# EAGLE board M_3x4._v5 (EAGLE 9.6.2)
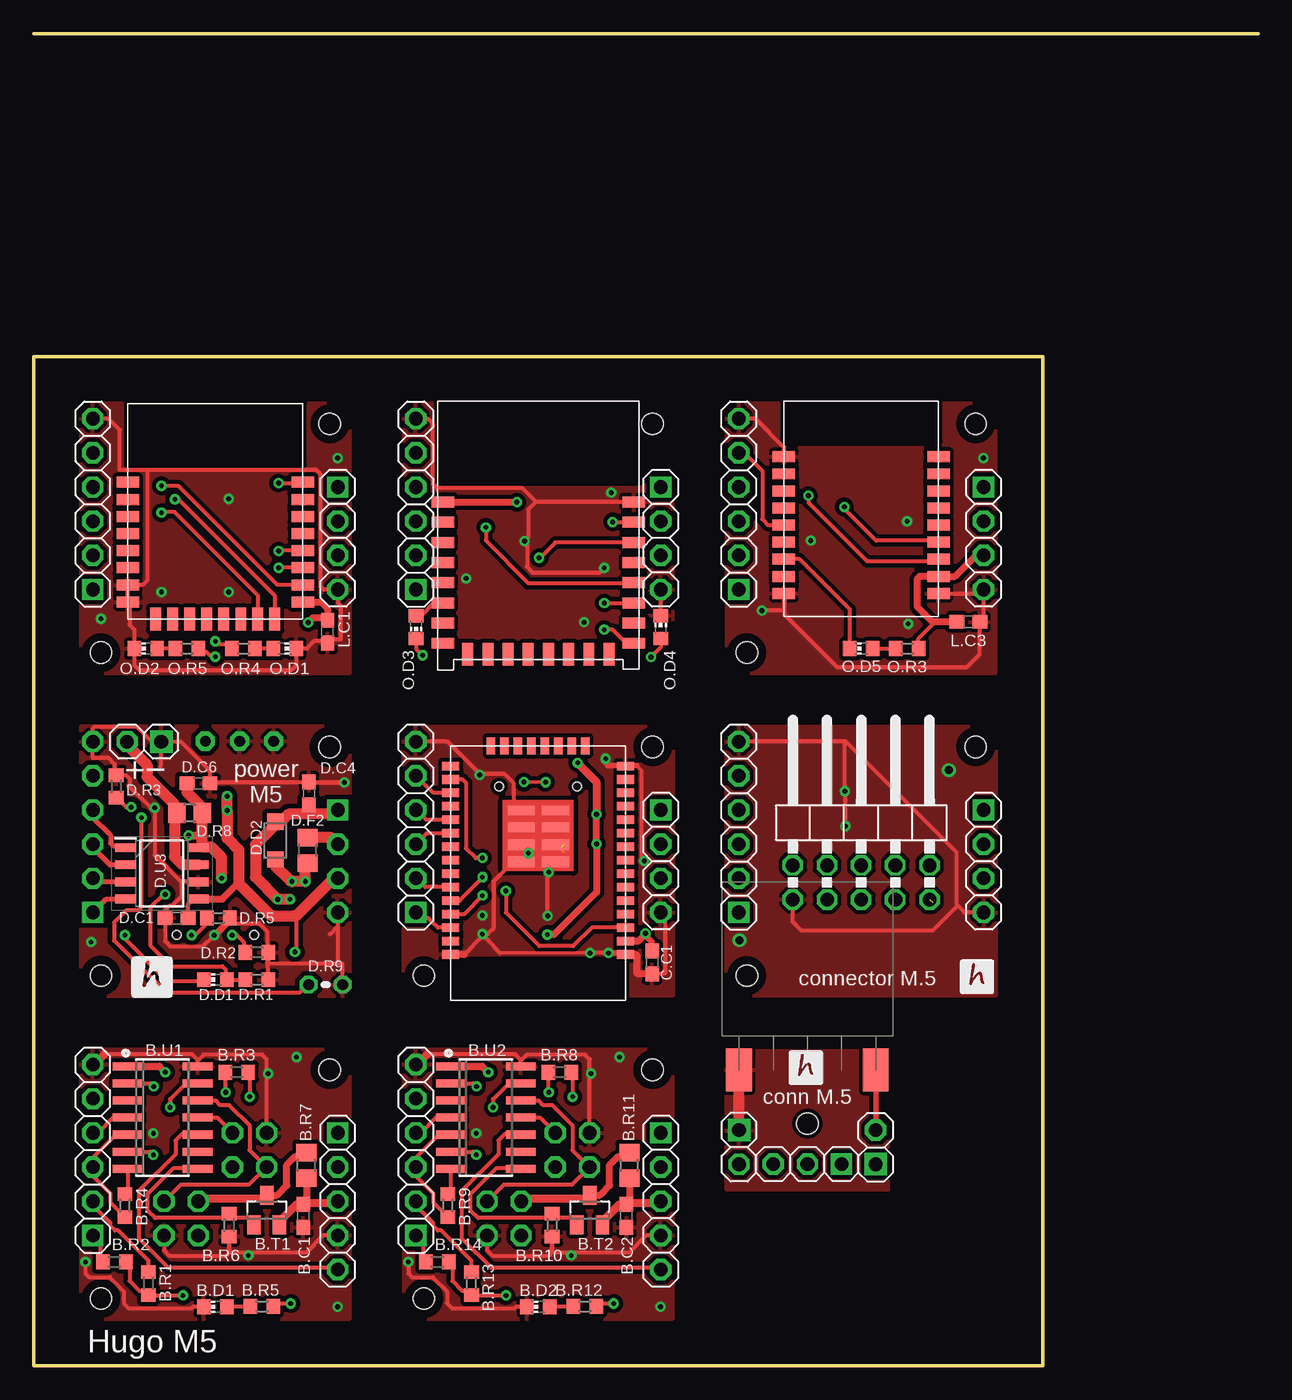
[diagram p0: board, top side]
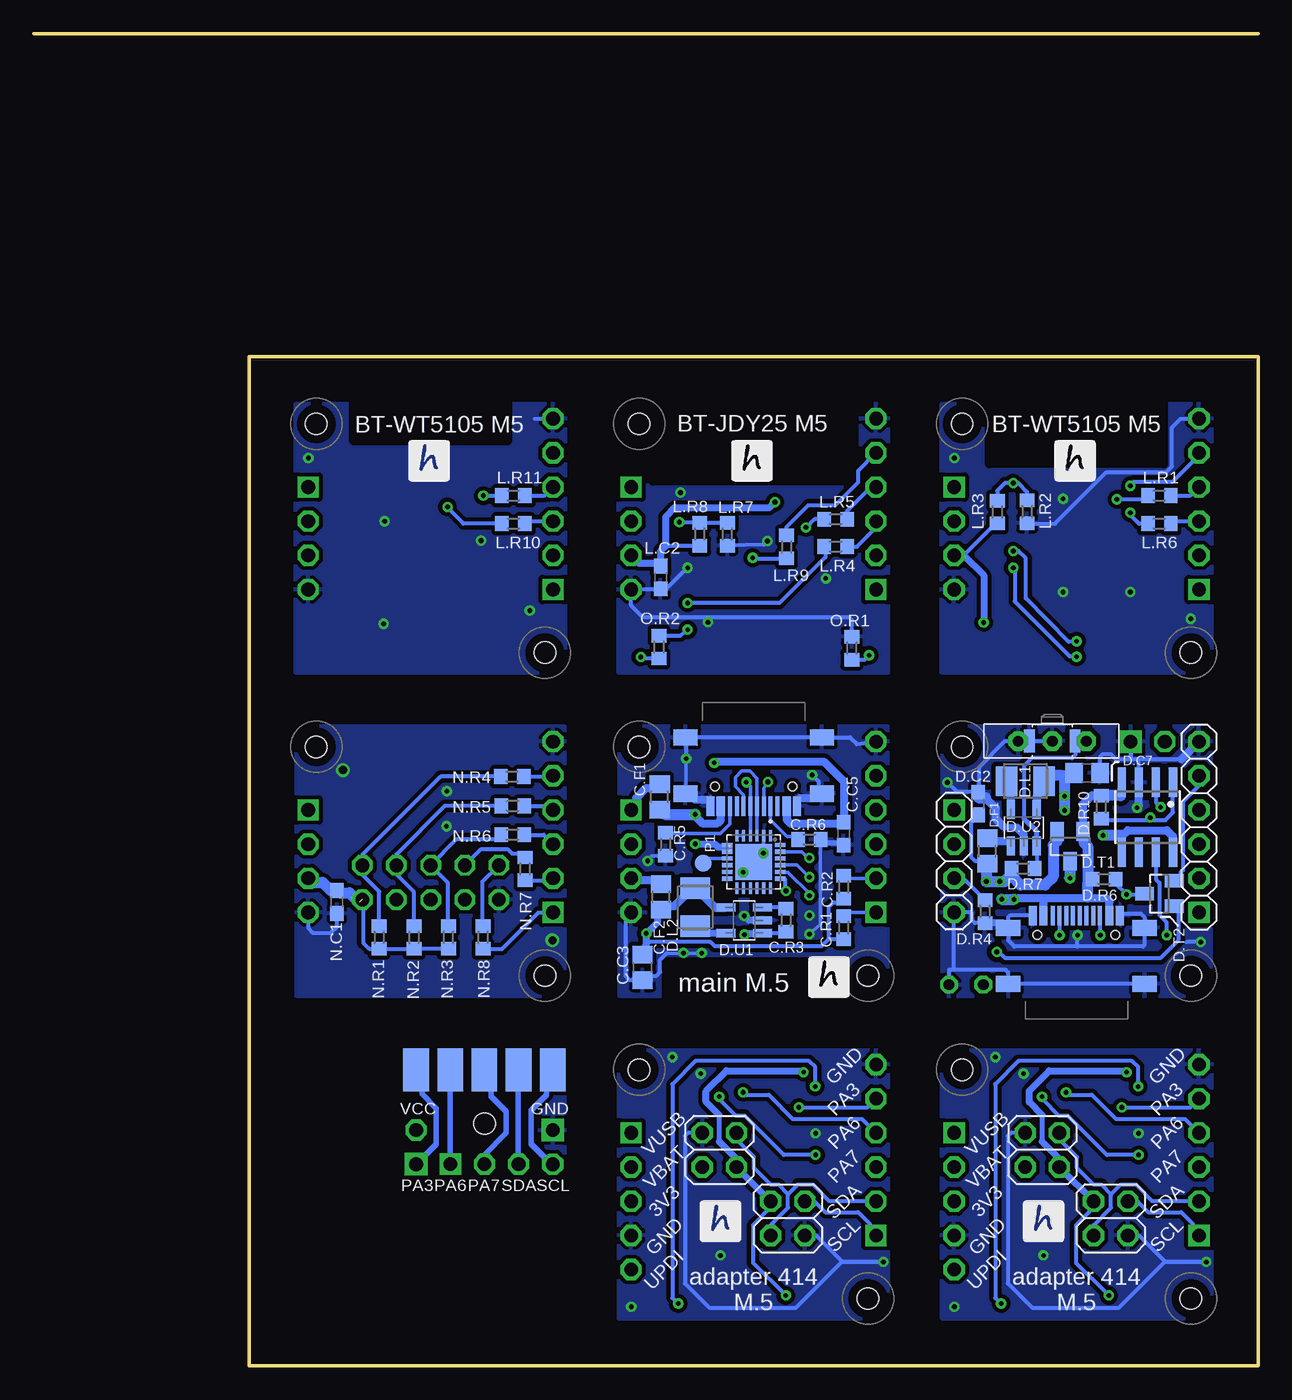
[diagram p1: board, bottom side, seen from below]

Size 91 x 99 mm. Coordinates in mm from the lower left corner, seen from the top.
Outline: 91,99 0,99
Outline: 0,0 75,0 75,75 0,75 0,0
Copper layers (1*16): Top 0.035mm / dielectric 1.5mm / Bottom 0.035mm
Design rules "default *": minimum track width 10mil, minimum drill 0.35mm, track to track 6mil, track to pad 6mil, pad to pad 6mil, via to via 6mil, smd to smd 6mil, copper to edge 0mil, drill to drill 15mil, minimum pad ring 10mil, minimum via ring 8mil, stop-mask expansion 4mil, vias tented up to drill 0mil, thermal gap 10mil
Holes 1.6 mm at 70,46 53,29 5,29 22,46 29,29 46,46 5,53 22,70 46,70 53,53 70,70 57.5,18 5,5 22,22 29,5 46,22
tRestrict: area 69,45 to 71,47; area 52,28 to 54,30; area 21,45 to 23,47; area 4,28 to 6,30; area 45,45 to 47,47; area 28,28 to 30,30; area 21,69 to 23,71; area 4,52 to 6,54; area 45,69 to 47,71; area 69,69 to 71,71; area 52,52 to 54,54; area 21,21 to 23,23; 3 more areas
bRestrict: area 52,28 to 54,30; area 69,45 to 71,47; area 4,28 to 6,30; area 21,45 to 23,47; area 28,28 to 30,30; area 45,45 to 47,47; area 4,52 to 6,54; area 21,69 to 23,71; area 45,69 to 47,71; area 52,52 to 54,54; area 69,69 to 71,71; area 21,21 to 23,23; 3 more areas

## Footprints (pad centres in the part's own frame; a part is rotated, then mirrored left to right if it is on the bottom)
C0603 = smd 1.1 x 1: 1 -0.85,0; 2 0.85,0
CHIP-LED0603 = smd 1.1 x 1: A1 0,-0.85; C1 0,0.85
1X05 = drill 1.016 pad 1.575 square: 1 -5.08,0 | drill 1.016 pad 1.575 octagon: 2 -2.54,0; 3 0,0; 4 2.54,0; 5 5.08,0
1X06 = drill 1.016 pad 1.575 square: 1 -6.35,0 | drill 1.016 pad 1.575 octagon: 2 -3.81,0; 3 -1.27,0; 4 1.27,0; 5 3.81,0; 6 6.35,0
2X02 = drill 1.016 pad 1.575 octagon: 1 -1.27,-1.27; 2 -1.27,1.27; 3 1.27,-1.27; 4 1.27,1.27
R0603 = smd 1 x 1.1: 1 -0.85,0; 2 0.85,0
FUSE = smd 1.3 x 1.5: 1 -0.95,0; 2 0.95,0
SO23 = smd 1 x 1.4: D 0,1.1; G -0.95,-1.1; S 0.95,-1.1
SO14 = smd 0.6 x 2.2: 1 -3.81,-2.6; 2 -2.54,-2.6; 3 -1.27,-2.6; 4 0,-2.6; 5 1.27,-2.6; 6 2.54,-2.6; 7 3.81,-2.6; 8 3.81,2.6; 9 2.54,2.6; 10 1.27,2.6; 11 0,2.6; 12 -1.27,2.6; 13 -2.54,2.6; 14 -3.81,2.6
C0805 = smd 1.3 x 1.5: 1 -0.95,0; 2 0.95,0
R0805 = smd 1.3 x 1.5: 1 -0.95,0; 2 0.95,0
TTGO-MICRO-32 = smd 1.27 x 0.635: 3V3 -6.5,5; EN -6.5,4; GND1 -6.5,6; GND2 -6.5,-8; GND3 6.5,6; IO0 6.5,-7; IO2 6.5,-8; IO4 6.5,-6; IO5 6.5,-3; IO12 -6.5,-7; IO14 -6.5,-6; IO16 6.5,-5; IO17 6.5,-4; IO18 6.5,-2; IO19 6.5,-1; IO21 6.5,1; IO22 6.5,4; IO23 6.5,5; IO25 -6.5,-3; IO26 -6.5,-4; IO27 -6.5,-5; IO32 -6.5,-1; IO33 -6.5,-2; IO34 -6.5,1; IO35 -6.5,0; NC 6.5,0; RXD0 6.5,2; TXD0 6.5,3; VN -6.5,2; VP -6.5,3 | smd 0.635 x 1.27: CLK 0.5,-9.5; CMD -0.5,-9.5; IO13 -3.5,-9.5; IO15 3.5,-9.5; SD0 1.5,-9.5; SD1 2.5,-9.5; SD2 -2.5,-9.5; SD3 -1.5,-9.5 | smd 2.032 x 0.762: GND4 -1.27,-0.889; GND5 1.27,-0.889; GND6 -1.27,-2.159; GND7 1.27,-2.159; GND8 -1.27,-3.429; GND9 -1.27,-4.699; GND10 1.27,-3.429; GND11 1.27,-4.699
SHOTKY_2.8 = smd 1.2 x 1.2: A -1.4,0; K 1.4,0
1X04 = drill 1.016 pad 1.575 square: 1 -3.81,0 | drill 1.016 pad 1.575 octagon: 2 -1.27,0; 3 1.27,0; 4 3.81,0
L3230M = smd 1.6 x 2.2: 1 -1.4,0; 2 1.4,0
1X02 = drill 1.016 pad 1.676 square: 1 -1.27,0 | drill 1.016 pad 1.575 octagon: 2 1.27,0
SWITCH = drill 0.8 pad 1.422 octagon: P$1 -2.54,0; P$2 0,0; P$3 2.54,0 | smd 0.8 x 1.7: P$4 -1.7,0; P$5 1.7,0
THERM = drill 0.813 octagon: 1 -1.27,0; 2 1.27,0
SOT32-5 = smd 0.6 x 1.4: BP 0.95,1.35; GND 0,-1.35; SHDN 0.95,-1.35; VIN -0.95,-1.35; VOUT -0.95,1.35
SOIC127P600X175-8N = smd 1.528 x 0.65: 1 -2.711,1.905; 2 -2.711,0.635; 3 -2.711,-0.635; 4 -2.711,-1.905; 5 2.711,-1.905; 6 2.711,-0.635; 7 2.711,0.635; 8 2.711,1.905
1X03 = drill 1.016 pad 1.575 square: 1 -2.54,0 | drill 1.016 pad 1.575 octagon: 2 0,0; 3 2.54,0
2X05/90 = drill 1.016 octagon: 1 -5.08,-6.35; 2 -5.08,-3.81; 3 -2.54,-6.35; 4 -2.54,-3.81; 5 0,-6.35; 6 0,-3.81; 7 2.54,-6.35; 8 2.54,-3.81; 9 5.08,-6.35; 10 5.08,-3.81
B1,27 = smd 1.27 x 1.27: TP 0,0
QFN50P400X400X80-25N = smd 0.81 x 0.26: 1 -1.955,1.25; 2 -1.955,0.75; 3 -1.955,0.25; 4 -1.955,-0.25; 5 -1.955,-0.75; 6 -1.955,-1.25; 13 1.955,-1.25; 14 1.955,-0.75; 15 1.955,-0.25; 16 1.955,0.25; 17 1.955,0.75; 18 1.955,1.25 | smd 0.26 x 0.81: 7 -1.25,-1.955; 8 -0.75,-1.955; 9 -0.25,-1.955; 10 0.25,-1.955; 11 0.75,-1.955; 12 1.25,-1.955; 19 1.25,1.955; 20 0.75,1.955; 21 0.25,1.955; 22 -0.25,1.955; 23 -0.75,1.955; 24 -1.25,1.955 | smd 2.68 x 2.68: 25 0,0
7PIN_CONNECTOR = smd 3.175 x 1.905: 1 0,5.08; 7 0,-5.08 | smd 3.175 x 1.905 bottom: 2 0,5.08; 3 0,2.54; 4 0,0; 5 0,-2.54; 6 0,-5.08
USB-C = smd 0.6 x 1.45: A1B12 -3.235,3.825; A4B9 -2.46,3.825; B1A12 3.215,3.825; B4A9 2.44,3.825 | smd 0.3 x 1.45: A5 -1.26,3.825; A6 -0.26,3.825; A7 0.24,3.825; A8 1.24,3.825; B5 1.74,3.825; B6 0.74,3.825; B7 -0.76,3.825; B8 -1.76,3.825 | smd 1.8 x 1.2: SH1 -5.08,2.91; SH2 -5.08,-1.27; SH3 5.06,-1.27; SH4 5.06,2.91 | hole 0.65: 2.88,2.38; -2.9,2.38
SOP8 = smd 0.6 x 2.2: 1 -1.905,-2.6; 2 -0.635,-2.6; 3 0.635,-2.6; 4 1.905,-2.6; 5 1.905,2.6; 6 0.635,2.6; 7 -0.635,2.6; 8 -1.905,2.6
WT5105-M1 = smd 1.676 x 0.813: GND1 0,2.54; GND2 0,1.27; NC1 13,7.62; NC2 13,8.89; P14 13,2.54; P15 13,3.81; P18 13,6.35; P20 13,5.08; P23 0,10.16; P24 0,8.89; P25 0,7.62; P31 0,6.35; P32 0,5.08; P33 0,3.81; RST 13,10.16; VCC 13,1.27 | smd 0.813 x 1.676: P00 3.325,0; P01 4.595,0; P02 5.865,0; P03 7.135,0; P09 9.655,0; P10 10.925,0; P34 2.055,0; TM 8.405,0
JDY-25 = smd 1.676 x 0.813: ALED 14.6,2; GND 14.6,12.5; INPUT1 0.4,2; INPUT3 0.4,3.5; INPUT5 0.4,6.5; NC1 0.4,11; NC2 0.4,9.5; NC3 0.4,8; OUT3 14.6,3.5; OUT4 14.6,8; PWRC 14.6,9.5; RST 14.6,11; RXD 14.6,6.5; STAT 0.4,5; TXD 14.6,5; VCC 0.4,12.5 | smd 0.813 x 1.676: INPUT2 3.75,1.2; INPUT4 6.75,1.2; NC4 2.25,1.2; NC5 9.75,1.2; NC6 11.25,1.2; OUT1 12.75,1.2; OUT2 5.25,1.2; OUT5 8.25,1.2
E104-BT5011A = smd 1.676 x 0.813: CTS 11.5,8.05; DATA 0,2.97; DISC 0,5.51; GND1 0,11.86; GND2 0,1.7; GND3 11.5,1.7; LINK 0,4.24; MOD 0,8.05; NC11 0,10.59; NC12 0,9.32; RS 11.5,9.32; RTS 11.5,6.78; RXD 11.5,4.24; SWDCLK 11.5,10.59; SWDIO 11.5,11.86; TXD 11.5,5.51; VCC 11.5,2.97; WKP 0,6.78

## Placement (x,y rotation side)
B.C1  100n  [C0603]  20.04,11.15 270 top
B.C2  100n  [C0603]  44.04,11.15 270 top
B.D1  [CHIP-LED0603]  13.5,4.4 90 top
B.D2  [CHIP-LED0603]  37.5,4.4 90 top
B.J1  [1X05]  22.6,12.23 270 top
B.J2  [1X06]  4.4,16.04 90 top
B.J3  [2X02]  10.96,10.96 270 bottom
B.J4  [2X02]  16.04,16.04 270 bottom
B.J5  [1X06]  28.4,16.04 90 top
B.J6  [2X02]  34.96,10.96 270 bottom
B.J7  [2X02]  40.04,16.04 270 bottom
B.J8  [1X05]  46.6,12.23 270 top
B.R1  2k2  [R0603]  8.54,6.12 270 top
B.R2  2k2  [R0603]  6,7.72 0 top
B.R3  alt RX 0R  [R0603]  15.09,21.82 0 top
B.R4  alt TX 0R  [R0603]  6.78,11.92 90 top
B.R5  3k3  [R0603]  16.97,4.42 0 top
B.R6  100k  [R0603]  14.53,10.47 270 top
B.R7  alt fuse or 0R  [FUSE]  20.27,14.9 90 top
B.R8  alt RX 0R  [R0603]  39.09,21.82 0 top
B.R9  alt TX 0R  [R0603]  30.78,11.92 90 top
B.R10  100k  [R0603]  38.53,10.47 270 top
B.R11  alt fuse or 0R  [FUSE]  44.27,14.9 90 top
B.R12  3k3  [R0603]  40.97,4.42 0 top
B.R13  2k2  [R0603]  32.54,6.12 270 top
B.R14  2k2  [R0603]  30,7.72 0 top
B.T1  NX3008  [SO23]  17.33,11.59 0 top
B.T2  NX3008  [SO23]  41.33,11.59 0 top
B.U1  AT414  [SO14]  9.59,18.45 270 top
B.U2  AT414  [SO14]  33.59,18.45 270 top
C.C1  100n  [C0603]  45.96,29.98 270 top
C.C3  22u  [C0805]  45.75,29.62 270 bottom
C.C5  4u7  [C0603]  30.81,39.55 90 bottom
C.F1  0.5A  [R0805]  44.48,42.28 90 bottom
C.F2  0.5A  [R0805]  44.38,34.85 90 bottom
C.J2  [1X06]  28.4,40.04 90 top
C.R1  2k2  [R0603]  30.81,32.56 270 bottom
C.R2  2k2  [R0603]  30.81,35.58 270 bottom
C.R3  100k  [R0603]  35.08,33.12 270 bottom
C.R5  5K1  [R0603]  44.03,38.76 90 bottom
C.R6  5k1  [R0603]  33.35,39.11 180 bottom
C.U1  TTGO-MICRO-32  [TTGO-MICRO-32]  37.49,36.58 180 top
D.C1  100n  [C0603]  10.63,33.28 0 top
D.C2  4u7  [C0603]  20.81,41.78 270 bottom
D.C4  4u7  [C0603]  20.47,42.53 270 top
D.C6  4u7  [C0603]  12.25,43.29 180 top
D.C7  10u  [C0805]  12.72,44.05 180 bottom
D.D1  [CHIP-LED0603]  13.5,28.7 90 top
D.D2  SHOTKY_2.8  [SHOTKY_2.8]  17.96,39.04 270 top
D.F1  0.5A  [R0805]  20.13,38.26 90 bottom
D.F2  1.1A  [R0805]  20.36,38.31 90 top
D.J2  [1X06]  4.4,40.04 90 bottom
D.J3  [1X04]  22.6,37.5 270 bottom
D.L1  4u7  [L3230M]  17.3,43.46 0 bottom
D.L2  4u7  [L3230M]  41.83,34.09 90 bottom
D.LIPOL  [1X02]  8.21,46.39 180 top
D.ON/OFF/RESET  SWITCH  [SWITCH]  15.3,46.42 0 bottom
D.R1  4k7  [R0603]  16.6,28.7 180 top
D.R2  5k1  [R0603]  16.6,30.73 0 top
D.R3  I=1800/R (10k for 0.2A, 3k3 for 0.55A, 3k9 for 0.46A)  [R0603]  6.14,43.06 270 top
D.R4  100k  [R0603]  20.3,33.76 270 bottom
D.R5  5k1  [R0603]  13.74,33.28 0 top
D.R6  3k3  [R0603]  11.46,36.17 180 bottom
D.R7  390k  [R0603]  17.47,36.96 0 bottom
D.R8  0.1  [R0805]  11.6,41.08 180 top
D.R9  TERM_10K  [THERM]  21.7,28.33 180 top
D.R10  10k?  [R0603]  11.66,41.52 90 bottom
D.T1  FDV304  [SO23]  13.98,38.61 180 bottom
D.T2  NX3008  [SO23]  7.34,35.09 90 bottom
D.U1  MCP1603T-330I  [SOT32-5]  38.2,33.11 90 bottom
D.U2  MCP1603T-330I  [SOT32-5]  17.41,40 0 bottom
D.U3  INA219AIDR  [SOIC127P600X175-8N]  9.53,36.6 0 top
G.J1  [1X06]  4.4,64.04 90 top
G.J2  [1X04]  22.6,61.5 270 top
G.J3  [1X06]  28.4,64.04 90 top
G.J4  [1X04]  46.6,61.5 270 top
G.J5  [1X06]  52.4,64.04 90 top
G.J6  [1X04]  70.6,61.5 270 top
I.J3  [1X04]  70.6,37.5 270 top
JP1  [1X03]  57.5,15 180 top
JP2  [1X06]  52.4,40.04 90 top
JP3  [1X04]  46.6,37.5 270 top
JP4  [2X05/90]  61.5,41 0 top
JP5  [1X02]  52.42,16.25 270 top
JP6  [1X02]  62.58,16.25 90 top
L.C1  100n  [C0603]  21.85,54.56 90 top
L.C2  100n  [C0603]  44.4,58.59 90 bottom
L.C3  100n  [C0603]  69.47,55.29 180 top
L.R1  2k2  [R0603]  7.34,64.67 0 bottom
L.R2  2k2  [R0603]  17.17,63.47 90 bottom
L.R3  2k2  [R0603]  19.38,63.45 90 bottom
L.R4  2k2  [R0603]  31.4,60.88 0 bottom
L.R5  2k2  [R0603]  31.4,62.91 0 bottom
L.R6  2k2  [R0603]  7.34,62.58 0 bottom
L.R7  2k2  [R0603]  39.45,61.8 90 bottom
L.R8  2k2  [R0603]  41.5,61.8 90 bottom
L.R9  2k2  [R0603]  35.05,60.86 90 bottom
L.R10  2k2  [R0603]  55.34,62.58 0 bottom
L.R11  2k2  [R0603]  55.34,64.67 0 bottom
N.C1  100n  [C0603]  68.46,34.47 270 bottom
N.R1  4k7  [R0603]  65.32,31.84 90 bottom
N.R2  4k7  [R0603]  62.73,31.84 90 bottom
N.R3  4k7  [R0603]  60.17,31.84 90 bottom
N.R4  4k7  [R0603]  55.44,43.79 180 bottom
N.R5  4k7  [R0603]  55.4,41.6 180 bottom
N.R6  4k7  [R0603]  55.4,39.47 180 bottom
N.R7  4k7  [R0603]  54.48,36.93 90 bottom
N.R8  4k7  [R0603]  57.6,31.84 90 bottom
O.D1  [CHIP-LED0603]  18.67,53.3 270 top
O.D2  [CHIP-LED0603]  8.33,53.3 90 top
O.D3  [CHIP-LED0603]  28.42,54.9 180 top
O.D4  [CHIP-LED0603]  46.6,54.9 0 top
O.D5  [CHIP-LED0603]  61.5,53.3 90 top
O.R1  2k2  [R0603]  30.2,53.34 270 bottom
O.R2  2k2  [R0603]  44.53,53.41 90 bottom
O.R3  2k2  [R0603]  64.91,53.3 0 top
O.R4  2k2  [R0603]  15.6,53.3 180 top
O.R5  2k2  [R0603]  11.4,53.3 0 top
P1  TPB1,27  [B1,27]  41.24,37.37 0 bottom
U1  CP2104-F03-GM  [QFN50P400X400X80-25N]  37.49,37.46 270 bottom
U$1  7PIN_CONNECTOR  [7PIN_CONNECTOR]  57.5,22 270 top
U$2  USB-C  [USB-C]  13.5,29.64 0 bottom
U$3  CN3083  [SOP8]  8.23,40.77 180 bottom
U$4  USB-C  [USB-C]  37.5,45.43 180 bottom
U$5  WT5105-M1  [WT5105-M1]  7,55.5 0 top
U$6  JDY-25  [JDY-25]  30,51.7 0 top
U$7  E104-BT5011A  [E104-BT5011A]  55.75,55.7 0 top

## Library data of the parts
B.C1 B.C2 C.C1 C.C3 C.C5 D.C1 D.C2 D.C4 D.C6 D.C7 L.C1-L.C3 N.C1 = rcl; SPICEPREFIX: C
B.D1 B.D2 D.D1 O.D1-O.D5 = led
B.J1-B.J8 C.J2 D.J2 D.J3 D.LIPOL G.J1-G.J6 I.J3 JP1-JP6 = pinhead2
B.R1-B.R6 B.R8-B.R10 B.R12-B.R14 C.F1 C.F2 C.R1-C.R3 C.R5 C.R6 D.F1 D.F2 D.R1-D.R8 D.R10 L.R1-L.R11 N.R1-N.R8 O.R1-O.R5 = rcl; SPICEPREFIX: R
B.R7 B.R11 B.T1 B.T2 C.U1 D.D2 D.ON/OFF/RESET D.R9 D.T1 D.T2 U$1-U$7 = hugo
B.U1 B.U2 = atmel
D.L1 D.L2 = rcl; SPICEPREFIX: L
D.U1 D.U2 = !stavebnice03
D.U3 = SamacSys_Parts; DESCRIPTION: 26-V, Bidirectional, Zero-Drift, High-Side, I2C Out Current/Power Monitor; HEIGHT: 1.75mm; MANUFACTURER_NAME: Texas Instruments; MANUFACTURER_PART_NUMBER: INA219AIDR; MOUSER_PART_NUMBER: 595-INA219AIDR; MOUSER_PRICE-STOCK: https://www.mouser.co.uk/ProductDetail/Texas-Instruments/INA219AIDR?qs=XGzIaZb%2FFYIE5YcOHTnKDA%3D%3D
P1 = testpad
U1 = CP2104; AVAILABILITY: Unavailable; DESCRIPTION: USB Bridge, USB to UART USB 2.0 UART Interface 24-QFN (4x4); MF: Silicon Labs; MP: CP2104; PACKAGE: QFN-24 Silicon Labs; PRICE: None

## Nets
GND: I.J3.4 JP2.6 JP4.1 N.C1.2
GND1: JP5.1 U$1.7
GND2: D.C1.1 D.C2.1 D.C4.1 D.C6.1 D.C7.1 D.J2.6 D.J3.4 D.LIPOL.1 D.ON/OFF/RESET.P$1 D.ON/OFF/RESET.P$2 D.ON/OFF/RESET.P$4 D.R1.1 D.R2.2 D.R3.1 D.R4.2 D.R5.2 D.R9.1 D.U2.GND D.U3.6 U$2.A1B12 U$2.B1A12 U$2.SH1 U$2.SH2 U$2.SH3 U$2.SH4 U$3.3
GND3: B.C1.2 B.D1.C1 B.J1.4 B.J2.6 B.J3.4 B.J4.1 B.R6.2 B.U1.14
GND4: B.C2.2 B.D2.C1 B.J5.6 B.J6.4 B.J7.1 B.J8.4 B.R10.2 B.U2.14
GND6: C.C1.2 C.C3.2 C.C5.1 C.J2.6 C.R5.1 C.R6.1 C.U1.GND1 C.U1.GND2 C.U1.GND3 C.U1.GND4 C.U1.GND5 C.U1.GND6 C.U1.GND7 C.U1.GND8 C.U1.GND9 C.U1.GND10 C.U1.GND11 D.U1.GND JP3.4 U1.2 U1.25 U$4.A1B12 U$4.B1A12 U$4.SH1 U$4.SH2 U$4.SH3 U$4.SH4
GND7: G.J1.6 G.J2.4 L.C1.1 L.R2.1 O.D1.C1 O.D2.C1 U$5.GND1 U$5.GND2
GND8: G.J3.6 G.J4.4 L.C2.1 L.R7.1 O.D4.C1 O.R1.1 U$6.GND
GND9: G.J5.6 G.J6.4 L.C3.1 U$7.GND1 U$7.GND2 U$7.GND3
IN+: D.LIPOL.2 D.R8.2 D.U3.7
IN-: D.C6.2 D.R8.1 D.T1.D D.U3.8 U$3.5 U$3.8
N$1: D.L1.1 D.U2.VOUT
N$2: JP4.10 N.R1.2 N.R4.2
N$3: JP4.8 N.R2.2 N.R5.2
N$4: JP2.5 N.R4.1
N$5: JP2.4 N.R5.1
N$6: JP2.3 N.R6.1
N$7: JP2.2 N.R7.1
N$8: JP2.1 N.R8.1
N$9: JP4.6 N.R3.2 N.R6.2
N$10: JP4.4 N.R7.2
N$11: JP4.2 N.R8.2
N$12: D.ON/OFF/RESET.P$3 D.ON/OFF/RESET.P$5 D.R7.2 D.U2.SHDN
N$13: D.R5.1 U$2.B5
N$14: D.R2.1 U$2.A5
N$15: D.R3.2 U$3.2
N$16: D.J2.5 D.T2.S
N$17: D.D1.C1 U$3.7
N$18: D.R9.2 D.R10.1 U$3.1
N$19: D.F1.2 D.U2.VIN
N$20: B.R4.2 B.U1.7
N$21: B.R3.2 B.U1.6
N$22: B.R6.1 B.T1.G B.U1.8
N$24: B.C1.1 B.J1.3 B.R7.1 B.T1.S
N$25: B.R5.2 B.U1.2
N$27: B.R9.2 B.U2.7
N$28: B.R8.2 B.U2.6
N$29: B.R10.1 B.T2.G B.U2.8
N$30: B.C2.1 B.J8.3 B.R11.1 B.T2.S
N$31: B.R12.2 B.U2.2
N$34: U1.4 U$4.A7 U$4.B7
N$35: U1.3 U$4.A6 U$4.B6
N$36: C.R6.2 U$4.A5
N$37: C.R5.2 U$4.B5
N$38: C.F2.2 JP3.3
N$39: C.F1.2 JP3.1
N$40: P1.TP U1.9
N$41: U1.5 U1.6
N$42: D.L2.1 D.U1.VOUT
N$43: C.R3.1 D.U1.SHDN
N$44: C.J2.5 C.U1.IO4
N$45: C.J2.4 C.U1.IO17
N$46: C.J2.3 C.U1.IO5
N$50: L.R6.1 U$5.P09
N$51: G.J1.4 L.R1.2
N$52: L.R1.1 U$5.P10
N$53: G.J1.5 U$5.P14
N$54: L.R2.2 L.R3.2 U$5.RST
N$55: O.R4.2 U$5.P20
N$56: O.R5.2 U$5.P15
N$57: O.D1.A1 O.R4.1
N$58: O.D2.A1 O.R5.1
N$59: L.R7.2 L.R8.2 U$6.RST
N$60: L.R5.1 U$6.RXD
N$61: L.R4.1 U$6.TXD
N$62: G.J3.5 L.R9.2
N$63: L.R9.1 U$6.PWRC
N$64: O.D4.A1 O.R2.1
N$65: O.R2.2 U$6.ALED
N$66: O.D3.A1 U$6.STAT
N$67: U$6.INPUT1
N$68: U$6.INPUT2
N$69: U$6.INPUT3
N$70: U$6.INPUT4
N$71: U$6.INPUT5
N$72: U$6.OUT5
N$73: U$6.OUT1
N$74: U$6.OUT2
N$75: U$6.OUT3
N$76: U$6.OUT4
N$77: O.D3.C1 O.R1.2
N$78: G.J5.4 L.R11.2
N$79: O.D5.A1 O.R3.1
N$80: L.R10.1 U$7.TXD
N$81: L.R11.1 U$7.RXD
N$82: G.J5.5 U$7.WKP
N$83: O.D5.C1 U$7.LINK
PA1: D.J2.4 D.U3.1
PA2: D.J2.3 D.U3.2
PA3: JP6.1 U$1.2
PA4: D.D1.A1 D.R1.2 D.R6.1 D.T2.D
PA5: B.J2.5 B.U1.13
PA6: JP1.1 U$1.3
PA7: JP1.2 U$1.4
PA8: B.J2.4 B.R3.1 B.U1.4
PA9: B.J2.3 B.R4.1 B.U1.5
PA10: B.D1.A1 B.R5.1
PA11: B.J5.5 B.U2.13
PA12: B.J5.4 B.R8.1 B.U2.4
PA13: B.J5.3 B.R9.1 B.U2.5
PA14: B.D2.A1 B.R12.1
PROG: C.U1.IO0 U1.23
RESET: C.U1.EN U1.19
RX: C.U1.TXD0 U1.20
RX1: G.J3.3 L.R4.2
SCL: D.J2.1 D.U3.4
SCL1: JP5.2 U$1.6
SCL2: B.J2.1 B.J3.2 B.J4.3 B.R2.1 B.U1.12
SCL3: B.J5.1 B.J6.2 B.J7.3 B.R14.1 B.U2.12
SCL5: C.J2.1 C.R1.1 C.U1.IO22
SDA: D.J2.2 D.U3.3
SDA1: JP1.3 U$1.5
SDA2: B.J2.2 B.J3.3 B.J4.2 B.R1.1 B.U1.11
SDA3: B.J5.2 B.J6.3 B.J7.2 B.R13.1 B.U2.11
SDA5: C.J2.2 C.R2.1 C.U1.IO21
TX: C.U1.RXD0 U1.21
TX1: G.J3.4 L.R5.2
UPDI: B.J1.5 B.U1.10
UPDI1: B.J8.5 B.U2.10
VBAT: B.J1.2
VBAT1: B.J8.2
VBATF: D.F2.2 D.J3.2
VCC: I.J3.3 JP4.9 N.C1.1 N.R1.1 N.R2.1 N.R3.1
VCC1: JP6.2 U$1.1
VCC2: D.C1.2 D.C7.2 D.J3.3 D.L1.2 D.R4.1 D.T2.G D.U2.BP D.U3.5
VCC3: B.J3.1 B.J4.4 B.R1.2 B.R2.2 B.R7.2 B.T1.D B.U1.1
VCC4: B.J6.1 B.J7.4 B.R11.2 B.R13.2 B.R14.2 B.T2.D B.U2.1
VCC6: C.C1.1 C.C3.1 C.F2.1 C.R1.2 C.R2.2 C.U1.3V3 D.L2.2 D.U1.BP
VCC7: G.J2.3 L.C1.2 L.R3.1 U$5.VCC
VCC8: G.J1.3 L.R6.2
VCC9: G.J4.3 L.C2.2 L.R8.1 U$6.VCC
VCC10: G.J6.3 L.C3.2 O.R3.2 U$7.VCC
VCC11: G.J5.3 L.R10.2
VMOT: D.C2.2 D.D2.K D.F1.1 D.F2.1 D.R7.1 D.T1.S
VUSB: D.C4.2 D.D2.A D.J3.1 D.R6.2 D.R10.2 D.T1.G U$2.A4B9 U$2.B4A9 U$3.4
VUSB1: B.J1.1
VUSB2: B.J8.1
VUSB4: C.C5.2 C.F1.1 C.R3.2 D.U1.VIN U1.7 U1.8 U$4.A4B9 U$4.B4A9

## Tracks (layer width: path | path; a pad name or v marks a point on that pad's centre or on a via)
GND  (via drill 0.35, 0.61)
  Top 0.305: 60.3,46.39 60.36,46.39 68.59,38.16 68.59,34.29 68.67,34.21 | 60.3,46.39 JP2.6 | I.J3.4 69.19,33.69 68.67,34.21 | 68.67,34.21 66.8,32.33 57.07,32.33 56.42,32.98 JP4.1 | v60.32,40.11 60.3,40.13 v60.3,42.7 60.3,46.39
  Top 0.61: JP2.6 52.45,46.39
  Bottom 0.305: 68.5,33.1 68.5,33.59 N.C1.2 68.46,32.63 68.92,32.18 70.25,32.18 70.6,32.53 I.J3.4
  other vias: 68.02,44.27 52.45,31.62
  pour Top (isolate 0.305): 51.47,47.5 71.5,47.5 71.5,27.5 51.47,27.5
  pour Bottom (isolate 0.305): 51.5,47.5 71.5,47.5 71.5,27.5 51.5,27.5
GND1
  Top 0.813: JP5.1 U$1.7
  pour Top (isolate 0.305): 51.5,23.42 63.5,23.42 63.5,13.1 51.5,13.1
  pour Bottom (isolate 0.305): 51.5,23.42 63.5,23.42 63.5,13.1 51.5,13.1
GND2  (via drill 0.35)
  Top 0.305: D.LIPOL.1 10.91,46.39 13.1,44.2 D.C6.1 13.17,43.36 v23.09,43.36 20.49,43.36 D.C4.1 | D.R3.1 6.04,44.01 6.04,44.69 5.57,45.16 4.45,45.16 4.4,45.21 D.J2.6 4.4,47.37 4.53,47.51 7.67,47.51 9.43,45.75 9.43,44.57 | D.R3.1 6.37,43.68 | D.U3.6 12.21,35.99 10.96,35.99 10.96,34.86 10.27,34.17 10.06,34.17 9.85,33.96 9.85,33.35 D.C1.1 9.78,32.39 9.76,32.38 9.76,31.57 10.16,31.16 12.58,31.16 v13.41,32 13.44,32 | 10.94,35.99 8.98,37.95 8.98,41.47 v9,41.48 8.69,41.48 7.14,43.03 7.14,43.61 6.85,43.91 D.R3.1 | 22.02,32.08 22.6,32.65 D.J3.4 22.6,29.87 | 17.37,28.81 D.R1.1 17.35,30.58 | 22.6,29.87 22.95,29.87 22.95,28.34 D.R9.1 | 22.6,29.87 17.41,29.87 17.34,29.95 D.R2.2 17.34,30.78 17.35,30.58 | 17.35,30.58 17.35,32.28 16.76,32.88 15,32.88 D.R5.2 14.59,33.16
  Top 0.508: 14.59,33.16 13.44,32
  Bottom 0.305: 9.48,45.08 D.LIPOL.1 9.51,46.37 9.51,45.19 | 20.77,42.82 20.77,44.46 18.81,46.42 D.ON/OFF/RESET.P$1 | 5.71,45.08 8.87,45.08 | 8.87,45.08 9.48,45.08 | D.ON/OFF/RESET.P$1 D.ON/OFF/RESET.P$2 | D.ON/OFF/RESET.P$4 D.ON/OFF/RESET.P$1 | v23.09,43.36 22.41,42.67 20.82,42.67 D.C2.1 20.78,42.22 | U$3.3 8.87,45.08 | v9,41.48 8.87,41.61 | U$2.B1A12 10.16,33.59 8.72,33.59 8.44,33.31 U$2.SH4 | U$2.A1B12 18.45,33.47 18.58,33.34 U$2.SH1 | D.R9.1 22.96,28.34 22.96,29.44 22.6,29.44 | 22.6,29.44 D.J3.4 21.28,33.69 21.28,33.14 21.05,32.91 D.R4.2 | 8.44,28.6 U$2.SH3 U$2.SH2 18.58,29.23 18.78,29.44 22.6,29.44 | U$2.SH1 18.93,32.91 | U$2.SH4 8.88,32.55 | 13.46,31.16 8.57,31.16 8.44,31.29 U$2.SH4 | 13.46,31.16 18.12,31.16 18.58,31.62 U$2.SH1 | v13.41,32 13.46,31.95 13.46,31.16 | v4.27,31.5 5.32,31.5 | 11.59,44.05 D.C7.1 11.77,45.23 11.59,45.41 10.9,45.41 10.56,45.08 9.48,45.08
  Bottom 0.406: 18.14,39.99 18.21,40.06 18.89,40.06
  Bottom 0.508: 17.91,39.99 18.14,39.99 | 18.93,32.91 D.R4.2
  Bottom 0.61: D.U2.GND 17.41,39.49 17.91,39.99 | 11.59,44.05 11.79,44.26 | D.J2.6 5.71,45.08 | 8.87,41.61 U$3.3 | 18.89,40.06 19.48,40.66 19.48,41.43 20.27,42.22
  Bottom 0.813: 20.78,42.22 20.27,42.22
  pour Top (isolate 0.356): 3.5,47.5 3.5,27.5 23.5,27.5 23.5,47.5
  pour Bottom (isolate 0.356, rank 3): 3.5,47.5 23.5,47.5 23.5,27.5 3.5,27.5
GND3  (via drill 0.35)
  Top 0.305: B.J2.6 4.48,22.39 | 5.27,23.17 11.76,23.17 12.19,22.75 B.U1.14 12.19,22.67 12.63,23.12 16.98,23.12 17.31,22.79 B.J4.1 | B.J3.4 9.69,8.59 10.09,8.19 14.3,8.19 14.53,8.42 B.R6.2 14.53,8.55 14.66,8.42 20.24,8.42 21.51,9.69 B.J1.4 | B.D1.C1 11.86,4.4 11.71,4.25 7.12,4.25 6.71,4.65 6.71,5.54 5.66,6.59 4.12,6.59 3.85,6.86 v3.85,7.72
  Top 0.61: 4.48,22.39 5.27,23.17
  Bottom 0.305: B.J4.1 18.38,17.31 18.61,17.08 18.61,6.13 16.79,4.32 10.35,4.32 6.95,7.72 v3.85,7.72 6.91,7.72 8.88,9.69 B.J3.4
  other vias: 8.89,17.27 22.58,4.4 17.43,21.72 19.54,22.94 15.95,8.21
  pour Bottom (isolate 0.305): 3.5,23.5 3.5,3.5 23.5,3.5 23.5,23.5
  pour Top (isolate 0.305): 3.5,23.5 3.5,3.5 23.5,3.5 23.5,23.5
GND4  (via drill 0.35)
  Top 0.305: B.J5.6 28.48,22.39 | 29.27,23.17 35.76,23.17 36.19,22.75 B.U2.14 36.19,22.67 36.63,23.12 40.98,23.12 41.31,22.79 B.J7.1 | B.J6.4 33.69,8.59 34.09,8.19 38.3,8.19 38.53,8.42 B.R10.2 38.53,8.55 38.66,8.42 44.24,8.42 45.51,9.69 B.J8.4 | B.D2.C1 35.86,4.4 35.71,4.25 31.11,4.25 30.71,4.65 30.71,5.54 29.66,6.59 28.12,6.59 27.85,6.86 v27.85,7.72
  Top 0.61: 28.48,22.39 29.27,23.17
  Bottom 0.305: B.J7.1 42.38,17.31 42.6,17.08 42.6,6.13 40.79,4.32 34.35,4.32 30.95,7.72 v27.85,7.72 30.91,7.72 32.88,9.69 B.J6.4
  other vias: 32.89,17.27 46.58,4.4 41.43,21.72 43.54,22.94 39.95,8.21
  pour Bottom (isolate 0.305): 27.5,23.5 27.5,3.5 47.5,3.5 47.5,23.5
  pour Top (isolate 0.305): 27.5,23.5 27.5,3.5 47.5,3.5 47.5,23.5
GND6  (via drill 0.35)
  Top 0.254: 44.79,44.63 45.17,44.24 45.17,37.78 45.37,37.59 v45.37,37.52 | 36.17,37.21 36.42,37.47 36.8,37.84 37.47,37.84 38.1,37.21 | v38.2,33.43
  Top 0.305: 42.65,44.63 42.51,44.77 v42.51,45.12 42.51,44.97 | 43.94,44.63 C.U1.GND2 | v33.35,32.09 33.27,31.82 32.02,30.57 | C.U1.GND3 | 33.23,43.99 v33.14,43.91 | v33.14,43.91 33.14,44.04 30.8,46.38 30.61,46.39 C.J2.6 | 45.96,29.14 C.C1.2 46.91,29.13 46.91,33.38 JP3.4 | C.U1.GND1 43.88,30.46 43.85,30.46 43.74,30.57 44.19,30.55 | v33.35,32.09 34.65,30.66 v41.35,30.68 41.36,30.67 41.5,30.68 v42.72,30.68 | v33.14,43.91 33.21,43.97 35.01,43.97 35.65,43.33 35.65,41.79 36.73,40.71 36.73,39.76 36.73,38.57 | 36.73,38.57 36.73,38.43 36.73,37.13 38.2,38.6 v38.2,33.43 | 39.32,37.26 38.15,37.26 38.1,37.21 36.17,37.21 | 36.42,37.47 C.U1.GND5 | v38.2,33.43 38.05,33.62 | 36.73,38.57 34.17,36.01 34.17,32.52 33.73,32.09 v33.35,32.09
  Top 0.406: 42.65,44.63 43.94,44.63 44.79,44.63 | 44.19,30.55 43.39,30.68 v42.72,30.68
  Top 0.508: 32.02,30.57 C.U1.GND3 | C.C1.2 44.86,29.13 44.86,30.48 44.76,30.58 C.U1.GND1 43.95,30.61 | C.U1.GND10 36.48,40.01 36.73,39.76 | C.U1.GND7 36.42,38.73 36.73,38.43
  Bottom 0.254: v33.35,32.09 32.52,32.79 32.52,39.03 C.R6.1 32.35,38.86 | v42.51,45.12 42.51,42.57 U$4.SH4 | v45.37,37.52 45.37,37.63 45.09,37.91 C.R5.1 | D.U1.GND 36.88,33.14 | U1.2 36.75,38.4 36.77,38.38 v36.77,38.1 36.86,38.1 U1.25 | C.C5.1 31.07,38.86
  Bottom 0.305: C.C3.2 45.68,28.67 | 42.49,45.12 v42.51,45.12 | U$4.A1B12 34.27,42.01 34.24,42.01 | 34.09,42.18 34.09,42.01 34.24,42.01 | 34.24,42.01 34.24,41.83 | v33.14,43.91 32.68,43.44 32.68,42.4 | v42.51,45.12 42.51,46.65 U$4.SH3 U$4.SH2 30.34,46.7 29.84,46.2 C.J2.6 | C.C3.2 45.43,28.99 44.72,28.99 44.45,29.26 44.45,30.18 43.97,30.66 v41.35,30.68 | 42.32,42.52 U$4.SH4 42.29,42.52 41.84,42.06 | U$4.SH1 32.76,42.18 | 37.7,37.66 U1.25 | 36.71,38.46 37.46,37.71 | JP3.4 47,33.29 47,28.96 46.71,28.67 C.C3.2 | 42.56,45.07 v42.51,45.12 | C.C5.1 30.72,38.7 30.65,38.63 | U$4.B1A12 40.72,42.05 40.73,42.06
  Bottom 0.406: 32.35,38.86 31.07,38.86
  Bottom 0.508: D.U1.GND 36.87,33.12 37.87,33.12 38.06,33.43 v38.2,33.43 | U1.25 37.75,37.21 38.1,37.21
  Bottom 0.61: 40.73,42.06 41.84,42.06 | 32.76,42.18 34.09,42.18
  other vias: 38.28,36.68 33.35,33.47
  pour Top (isolate 0.305): 27.5,27.5 27.5,47.5 47.5,47.5 47.5,27.5
  pour Bottom (isolate 0.305): 27.5,47.5 47.5,47.5 47.5,27.5 27.5,27.5
GND7  (via drill 0.35)
  Top 0.305: 8.46,66.57 8.46,58.39 8.14,58.06 7.03,58.06 U$5.GND1 U$5.GND2 7.13,56.64 7.13,55.06 7.49,54.7 O.D2.C1 7.48,52.07 7.83,51.72 19.16,51.72 19.54,52.1 19.52,52.15 O.D1.C1 20.3,53.3 20.86,53.86 21.69,53.86 L.C1.1 22.13,53.98 22.83,53.98 22.83,56.5 22.62,56.7 22.62,57.66 G.J2.4 21.56,57.69 21.32,57.93 21.32,66.27 21.02,66.57 8.46,66.57 | 8.46,66.57 6.4,66.57 6.4,69.54 5.56,70.39 G.J1.6
  Bottom 0.305: G.J1.6 5.76,70.39 6.42,69.73 6.42,66.83 6.83,66.42 11.27,66.42 15.11,62.58 17.13,62.58 L.R2.1
  other vias: 22.58,67.46 5.01,55.52 14.5,64.44 14.5,57.5 9.5,57.5
  pour Top (isolate 0.305): 3.5,71.5 3.5,51.5 23.5,51.5 23.5,71.5
  pour Bottom (isolate 0.305): 3.5,71.5 3.5,51.5 23.53,51.5 23.53,71.5
GND8  (via drill 0.35)
  Top 0.305: G.J4.4 O.D4.C1 | G.J3.6 29.29,70.39 29.67,70 29.67,65.53 29.99,65.21 36.34,65.21 37.36,64.19 U$6.GND 37.3,64.19 36.75,63.65 36.75,61.57 v36.47,61.29 36.65,61.11 36.65,59.38 37.08,58.95 42.08,58.95 v42.4,59.31
  Bottom 0.305: O.R1.1 30.2,55.46 30.37,55.62 45.72,55.62 46.6,56.5 G.J4.4 44.9,57.69 44.84,57.74 L.C2.1 44.01,57.74 v42.4,59.31 | v36.47,61.29 36.73,61.03 L.R7.1
  other vias: 42.93,64.89 40.89,55.27 32.13,58.52
  pour Top (isolate 0.305): 27.5,71.5 27.5,51.5 47.5,51.5 47.5,71.5
  pour Bottom (isolate 0.305): 27.5,71.5 27.5,51.5 47.53,51.5 47.53,71.5
GND9  (via drill 0.35)
  Top 0.305: G.J5.6 53.63,70.39 55.77,68.25 55.77,67.58 U$7.GND1 | G.J6.4 70.62,57.66 70.62,57.4 | U$7.GND3 70.62,57.4 | v54.12,56.13 55.75,56.13 U$7.GND2 55.8,57.4 55.8,55.83 59.71,51.91 69.34,51.91 70.32,52.89 L.C3.1 70.62,55.29 70.62,57.4
  Bottom 0.305: 53.76,70.39 G.J5.6
  other vias: 70.58,67.46 65,55.14 64.92,62.76 57.76,61.34
  pour Top (isolate 0.305): 51.5,71.5 51.5,51.5 71.5,51.5 71.5,71.5
  pour Bottom (isolate 0.305): 51.5,71.5 51.5,51.5 71.53,51.5 71.53,71.5
IN+
  Top 0.813: D.LIPOL.2 6.94,46.14 8.44,44.64 8.44,43.76 10.47,41.73 10.47,41.25 D.R8.2 10.47,40.89 10.47,37.84 11.07,37.24 D.U3.7
IN-  (via drill 0.35)
  Top 0.305: 13.34,38.43 13.21,38.56 | 12.83,38.56 12.63,38.56 | 12.55,38.63 12.37,38.63 D.U3.8 12.39,38.66 12.39,39.42
  Top 0.61: v11.53,39.42 12.39,39.42
  Top 0.813: D.R8.1 12.35,41.28 12.35,41.68 11.4,42.63 D.C6.2 | D.R8.1 12.64,41.08 | v13.97,36.25 13.97,37.8 13.34,38.43 | D.R8.1 12.47,41 12.47,38.71 12.55,38.63 12.63,38.56 | 13.21,38.56 12.83,38.56
  Bottom 0.305: U$3.5 10.14,39.42
  Bottom 0.61: 10.14,38.76 U$3.5 10.14,39.37 9.71,39.8 6.79,39.8 6.33,39.34 U$3.8
  Bottom 0.813: D.T1.D 14,37.49 14,36.27 v13.97,36.25 | 10.14,39.42 v11.53,39.42
N$1
  Bottom 0.61: D.U2.VOUT 18.36,42.54 18.7,42.87 D.L1.1
N$2
  Bottom 0.305: N.R4.2 60.75,43.79 66.58,37.96 JP4.10 66.58,36.5 65.32,35.24 N.R1.2
N$3
  Bottom 0.305: 62.62,32.81 N.R2.2 62.77,32.74 62.77,35.26 64.04,36.53 JP4.8 64.04,38.01 60.45,41.6 N.R5.2
N$4
  Bottom 0.305: N.R4.1 52.46,43.79 JP2.5
N$5
  Bottom 0.305: JP2.4 52.7,41.6 N.R5.1
N$6
  Bottom 0.305: N.R6.1 53.1,39.47 JP2.3
N$7
  Bottom 0.305: N.R7.1 52.68,36.08 52.53,36.23 JP2.2
N$8
  Bottom 0.305: JP2.1 53.49,33.69 56.2,30.98 N.R8.1
N$9
  Bottom 0.305: 56.53,39.47 N.R6.2 56.65,39.14 59.56,39.14 61.5,37.2 JP4.6 60.23,35.92 60.23,32.75 N.R3.2
N$10
  Bottom 0.305: 54.61,37.91 N.R7.2 54.76,38.06 55.45,38.06 55.79,38.41 57.74,38.41 JP4.4
N$11
  Bottom 0.305: JP4.2 57.66,35.95 57.66,32.76 N.R8.2
N$12
  Bottom 0.305: 17.4,40.67 17.4,44.59 16.83,45.17 13.81,45.17 13.6,45.38 D.ON/OFF/RESET.P$5 D.ON/OFF/RESET.P$3 | D.U2.SHDN 16.46,37.11 D.R7.2
  Bottom 0.356: 16.45,38.63 D.U2.SHDN 16.46,39.73 17.4,40.67 | 16.45,37.13 D.R7.2
N$13  (via drill 0.35)
  Top 0.305: D.R5.1 12.74,33.13 12.74,32.73 12.01,32 v11.73,32
  Bottom 0.305: U$2.B5 11.76,32.2 v11.73,32
N$14  (via drill 0.35)
  Top 0.305: v14.76,32 14.95,32.16 15.64,31.47 D.R2.1
  Bottom 0.305: U$2.A5 v14.76,32
N$15  (via drill 0.35)
  Top 0.305: 6.27,42.2 D.R3.2 6.18,42.2 6.87,41.52 v7.25,41.52
  Bottom 0.305: U$3.2 7.6,41.88 v7.25,41.52
N$16
  Bottom 0.305: D.J2.5 4.4,43.11 5.59,41.91 5.59,36.85 5.76,36.68 5.76,36.37 6.09,36.04 D.T2.S
N$17  (via drill 0.35)
  Top 0.305: 12.79,28.97 D.D1.C1 12.47,28.58 9.94,28.58 6.79,31.73 v6.79,32.01
  Bottom 0.305: 7.62,38.14 U$3.7 7.6,36.15 7.34,35.89 7.34,33.5 6.79,32.95 v6.79,32.01
N$18  (via drill 0.35)
  Top 0.305: v8,40.73 v8.01,40.74 8.01,34.07 7.78,33.83 6.86,33.83 5.97,32.94 5.97,31.6 9.83,27.74 19.76,27.74 D.R9.2
  Bottom 0.305: v8.01,40.74 8.01,40.59 | 8.01,40.59 7.99,40.56 6.89,40.56 6.33,41.13 U$3.1 | D.R10.1 11.52,40.56 8.04,40.56 8.01,40.59
N$19
  Bottom 0.305: D.U2.VIN 18.36,38.88 18.5,39.01 | 19.93,39.01 D.F1.2
  Bottom 0.61: 19.93,39.01 18.5,39.01
  Bottom 0.813: D.F1.2 19.98,39.21
N$20
  Top 0.305: B.U1.7 6.99,12.97 B.R4.2
N$21  (via drill 0.35)
  Top 0.305: B.U1.6 8.65,15.91 v8.89,15.68 | B.R3.2 16.06,21.71 v16.06,20
  Bottom 0.305: v16.06,20 16.06,19.82 14.84,18.6 14.18,18.6 11.25,15.68 v8.89,15.68
N$22
  Top 0.305: B.T1.G 16.38,11.01 14.84,11.01 B.R6.1 14.2,10.98 9.03,10.98 8.45,11.57 8.45,12.76 10.35,14.67 12.16,14.67 B.U1.8
N$24
  Top 0.305: B.C1.1 20.12,12.08
  Top 0.508: B.R7.1 20.27,12.23 B.C1.1
  Top 0.61: 20.12,12.08 22.45,12.08 B.J1.3 | B.C1.1 19.54,12 18.28,10.74 B.T1.S
N$25  (via drill 0.35)
  Top 0.305: B.U1.2 8.68,21 v8.92,20.76 | v19.1,4.63 19.08,4.6 17.9,4.6 B.R5.2
  Bottom 0.305: v8.92,20.76 8.92,22.2 9.38,22.66 17.81,22.66 19.54,20.93 19.54,5.06 v19.1,4.63
N$27
  Top 0.305: B.U2.7 30.99,12.97 B.R9.2
N$28  (via drill 0.35)
  Top 0.305: B.U2.6 32.65,15.91 v32.89,15.68 | B.R8.2 40.06,21.71 v40.06,20
  Bottom 0.305: v40.06,20 40.06,19.82 38.84,18.6 38.18,18.6 35.25,15.68 v32.89,15.68
N$29
  Top 0.305: B.T2.G 40.38,11.01 38.84,11.01 B.R10.1 38.2,10.98 33.03,10.98 32.45,11.57 32.45,12.76 34.35,14.67 36.16,14.67 B.U2.8
N$30
  Top 0.305: B.C2.1 44.12,12.08
  Top 0.508: B.R11.1 44.27,12.23 B.C2.1
  Top 0.61: 44.12,12.08 46.45,12.08 B.J8.3 | B.C2.1 43.53,12 42.28,10.74 B.T2.S
N$31  (via drill 0.35)
  Top 0.305: B.U2.2 32.68,21 v32.92,20.76 | v43.1,4.63 43.08,4.6 41.9,4.6 B.R12.2
  Bottom 0.305: v32.92,20.76 32.92,22.2 33.38,22.66 41.81,22.66 43.53,20.93 43.53,5.06 v43.1,4.63
N$34  (via drill 0.35)
  Top 0.254: v38.03,43.38 v36.43,43.38
  Top 0.305: v38.04,43.38 v38.03,43.38
  Bottom 0.254: U$4.B7 36.74,42.93 v36.43,43.38 | v38.04,43.38 37.74,43.08 U$4.A7 U1.4
N$35
  Bottom 0.254: U1.3 37.24,39.42 U$4.A6 37.24,43.66 37.78,44.19 38.38,44.19 38.85,43.72 38.85,43.04 38.25,42.44 U$4.B6
N$36
  Bottom 0.254: U$4.A5 36.24,40.55 35.02,39.33 34.52,39.33 C.R6.2
N$37
  Bottom 0.254: U$4.B5 39.24,40.28 39.95,39.57 44,39.57 C.R5.2
N$38
  Bottom 0.305: C.F2.2 44.68,36.1
  Bottom 0.508: 46.47,36.1 JP3.3
  Bottom 0.61: 46.47,36.1 44.68,36.1
N$39
  Bottom 0.61: C.F1.2 44.77,42.94 45.48,42.94 46.21,42.21 46.21,41.7 JP3.1
N$40
  Bottom 0.254: U1.9 40.9,37.71 P1.TP
N$41
  Bottom 0.254: U1.5 U1.6
N$42
  Bottom 0.305: 39.58,32.16 D.U1.VOUT | D.L2.1 41.31,32.17
  Bottom 0.508: D.U1.VOUT 41.31,32.17
N$43
  Bottom 0.305: D.U1.SHDN 36.8,34.1 35.21,34.1 C.R3.1
N$44
  Top 0.305: C.U1.IO4 29.72,42.58 C.J2.5
N$45
  Top 0.305: C.U1.IO17 29.18,40.58 C.J2.4
N$46
  Top 0.305: C.U1.IO5 29.21,39.58 C.J2.3
N$50  (via drill 0.35)
  Top 0.305: U$5.P09 16.66,55.49 16.66,57.27 10.49,63.45 9.55,63.45 v9.5,63.4
  Bottom 0.305: v9.5,63.4 9.5,63.22 8.86,62.58 L.R6.1
N$51
  Bottom 0.305: G.J1.4 4.42,65.31 5.08,64.65 6.48,64.65 L.R1.2
N$52  (via drill 0.35)
  Top 0.305: 18.02,55.41 U$5.P10 17.93,57.22 10.76,64.4 v10.5,64.4
  Bottom 0.305: L.R1.1 8.19,64.41 10.49,64.41 v10.5,64.4
N$53  (via drill 0.35)
  Top 0.305: v9.5,65.4 9.52,65.38 10.79,65.38 18.13,58.04 U$5.P14
  Bottom 0.305: v9.5,65.4 9.5,65.52 9.28,65.7 6.35,65.7 4.4,67.66 G.J1.5
N$54  (via drill 0.35)
  Top 0.305: v18.2,65.61 19.95,65.61 U$5.RST
  Bottom 0.305: L.R2.2 17.17,64.94 17.83,65.61 v18.2,65.61 18.81,65.61 19.38,65.03 L.R3.2
N$55  (via drill 0.35)
  Top 0.305: O.R4.2 14.41,53.62 13.68,53.62 v13.5,53.85 | v18.2,60.55 18.19,60.58 U$5.P20
  Bottom 0.305: v13.5,53.85 14.08,53.8 17.27,57.04 17.27,60.01 17.81,60.55 v18.2,60.55
N$56  (via drill 0.35)
  Top 0.305: O.R5.2 12.5,53.05 12.84,53.05 13.22,52.68 v13.5,52.7 | v18.2,59.3 v18.2,59.31 U$5.P15
  Bottom 0.305: v13.5,52.7 13.52,52.74 14.02,52.74 18.09,56.81 18.1,59.2 v18.2,59.3
N$57
  Top 0.305: O.D1.A1 O.R4.1
N$58
  Top 0.305: O.R5.1 9.04,53.31 O.D2.A1
N$59  (via drill 0.35)
  Top 0.305: v43.03,62.71 43.04,62.7 U$6.RST
  Bottom 0.305: L.R7.2 39.47,62.62 39.68,62.63 39.7,62.65 L.R8.2 41.52,62.71 v43.03,62.71
N$60  (via drill 0.35)
  Top 0.305: U$6.RXD 44.55,58.15 36.8,58.15 33.61,61.34 v33.61,62.3
  Bottom 0.305: v33.61,62.3 33.58,62.3 32.97,62.91 L.R5.1
N$61  (via drill 0.35)
  Top 0.305: v42.4,56.69 v42.4,56.7 U$6.TXD
  Bottom 0.305: v42.4,56.69 35.56,56.69 32.16,60.09 32.16,60.79 L.R4.1
N$62
  Bottom 0.305: L.R9.2 35.05,62.35 33.43,63.97 31.42,63.97 29.72,65.66 29.72,66.53 G.J3.5
N$63  (via drill 0.35)
  Top 0.305: U$6.PWRC 38.77,61.2 37.62,60.04 v37.57,60.04
  Bottom 0.305: v37.57,60.04 37.53,60.01 L.R9.1
N$64  (via drill 0.35)
  Top 0.305: O.D4.A1 46.61,53.41 v45.87,52.68
  Bottom 0.305: O.R2.1 45.76,52.56 v45.87,52.68
N$65  (via drill 0.35)
  Top 0.305: U$6.ALED 44.05,53.7 43.04,54.71 v42.4,54.71
  Bottom 0.305: 42.53,54.75 v42.4,54.71 42.94,54.26 O.R2.2
N$66
  Top 0.305: O.D3.A1 28.78,55.74 29.74,56.7 U$6.STAT
N$77  (via drill 0.35)
  Top 0.305: O.D3.C1 28.42,53.29 v28.91,52.8
  Bottom 0.305: v28.91,52.8 29.23,52.47 30.19,52.47 O.R1.2
N$78
  Bottom 0.305: G.J5.4 52.42,65.31 53.08,64.65 54.48,64.65 L.R11.2
N$79
  Top 0.305: O.D5.A1 O.R3.1
N$80  (via drill 0.35)
  Top 0.305: U$7.TXD 67.15,61.31 62.61,61.31 60.25,63.67 v60.25,63.83
  Bottom 0.305: L.R10.1 59.05,62.58 60.25,63.78 v60.25,63.83
N$81  (via drill 0.35)
  Top 0.305: U$7.RXD 67.1,59.79 61.95,59.79 57.58,64.16 v57.58,64.66
  Bottom 0.305: v57.58,64.66 L.R11.1
N$82
  Top 0.305: G.J5.5 52.79,67.85 54.15,66.49 54.15,62.91 54.58,62.48 U$7.WKP
N$83
  Top 0.305: O.D5.C1 60.65,56.21 56.92,59.94 U$7.LINK
PA1
  Top 0.356: D.U3.1 6.71,38.61 5.96,38.61 5.72,38.85 5.72,39.45 4.4,40.77 D.J2.4
PA2
  Top 0.305: D.J2.3 4.4,38.51
  Top 0.356: 4.4,38.51 5.68,37.22 6.8,37.22 D.U3.2
PA3
  Bottom 0.406: U$1.2 62.15,21.57 62.15,20.2 61.08,19.14 61.08,16.48 JP6.1
PA4  (via drill 0.35)
  Top 0.305: 15.65,28.78 D.R1.2 D.D1.A1 14.25,28.88 14.25,29.46 14.02,29.69 10.21,29.69 8.71,31.19 8.71,34.09 9.65,35.03 v9.77,35.03
  Bottom 0.305: 10.61,36.05 D.R6.1 10.61,35.86 v9.77,35.03 8.44,35.03 8.41,35.06 | D.T2.D 8.41,35.06 | 8.41,35.06 8.32,35.15
PA5  (via drill 0.35)
  Top 0.305: B.U1.13 11.32,21 10.14,19.82 v10.14,19.2
  Bottom 0.305: B.J2.5 5.04,19.2 v10.14,19.2
PA6
  Bottom 0.406: U$1.3 JP1.1
PA7
  Bottom 0.406: U$1.4 57.02,21.52 57.02,20.04 55.88,18.91 55.88,17.3 57.5,15.69 JP1.2
PA8  (via drill 0.35)
  Top 0.305: B.U1.4 5.93,18.45 4.78,17.31 B.J2.4 | v14.28,20.32 14.28,21.78 B.R3.1
  Bottom 0.305: B.J2.4 5.42,18.33 10.55,18.33 12.37,20.14 14.1,20.14 v14.28,20.32
PA9
  Top 0.305: B.U1.5 6.97,17.2 6.13,17.2 4.4,15.47 B.J2.3 4.4,14.12 5.72,12.8 5.72,12.13 B.R4.1
PA10
  Top 0.305: B.R5.1 16.09,4.4 B.D1.A1
PA11  (via drill 0.35)
  Top 0.305: B.U2.13 35.32,21 34.14,19.82 v34.14,19.2
  Bottom 0.305: B.J5.5 29.05,19.2 v34.14,19.2
PA12  (via drill 0.35)
  Top 0.305: B.U2.4 29.93,18.45 28.78,17.31 B.J5.4 | v38.28,20.32 38.28,21.78 B.R8.1
  Bottom 0.305: B.J5.4 29.42,18.33 34.55,18.33 36.37,20.14 38.1,20.14 v38.28,20.32
PA13
  Top 0.305: B.U2.5 30.97,17.2 30.13,17.2 28.4,15.47 B.J5.3 28.4,14.12 29.72,12.8 29.72,12.13 B.R9.1
PA14
  Top 0.305: B.R12.1 40.09,4.4 B.D2.A1
PROG  (via drill 0.35)
  Top 0.305: C.U1.IO0 31.32,43.58 31.33,43.59 31.86,43.59 32.12,43.33 32.12,38.45 32.86,37.74 v33.35,37.74
  Bottom 0.254: U1.23 35.52,38.18 33.89,38.18 33.48,37.74 v33.35,37.74
RESET  (via drill 0.35)
  Top 0.305: C.U1.EN 41.49,32.58 40.09,31.19 37.59,31.19 35.09,33.68 v35.09,35.29
  Bottom 0.254: U1.19 35.49,36.15 35.16,36.15
  Bottom 0.305: 35.16,36.15 35.16,35.36 v35.09,35.29
RX  (via drill 0.35)
  Top 0.305: C.U1.TXD0 31.01,33.56 31.98,33.56 v33.35,34.95
  Bottom 0.254: U1.20 35.52,36.69 34.95,36.69 33.35,35.09 v33.35,34.95
RX1
  Bottom 0.305: L.R4.2 29.81,60.88 28.4,62.29 G.J3.3
SCL
  Top 0.356: D.U3.4 5.41,34.7 D.J2.1
SCL1
  Bottom 0.305: U$1.6 52.42,20.68
  Bottom 0.406: U$1.6 52.9,21.52 52.9,20.14 54.05,19 54.05,16.5 52.53,14.98 JP5.2
SCL2
  Top 0.305: B.U1.12 13.51,19.73 13.87,19.37 14.55,19.37 16.04,17.88 16.04,16.03 B.J4.3 16.02,13.47 10.95,13.47 9.71,12.23 B.J3.2 | B.J2.1 4.93,9.16 4.93,7.94 B.R2.1
  Bottom 0.305: B.J2.1 4.86,10.15 4.86,10.55 5.72,11.42 8.17,11.42 8.98,12.23 B.J3.2
SCL3
  Top 0.305: B.U2.12 37.51,19.73 37.87,19.37 38.55,19.37 40.04,17.88 40.04,16.03 B.J7.3 40.02,13.47 34.95,13.47 33.71,12.23 B.J6.2 | B.J5.1 28.93,9.16 28.93,7.94 B.R14.1
  Bottom 0.305: B.J5.1 28.86,10.15 28.86,10.55 29.72,11.42 32.17,11.42 32.98,12.23 B.J6.2
SCL5
  Top 0.305: C.U1.IO22 30.04,32.58 29.68,32.93 29.31,33.28 28.81,33.28 C.J2.1
  Bottom 0.254: C.R1.1 30.53,33.69 C.J2.1
SDA
  Top 0.305: 6.81,35.98 D.U3.3
  Top 0.356: D.U3.3 4.9,35.97 4.78,35.85 D.J2.2
SDA1
  Bottom 0.406: 55.12,21.62 U$1.5 54.98,21.98 54.98,15.03 JP1.3 55.12,15.16
SDA2
  Top 0.305: B.U1.11 13.62,18.45 B.J4.2 | B.J2.2 4.4,11.93 5.7,10.62 5.7,10.41 6.05,10.06 6.29,10.06 8.54,7.81 B.R1.1
  Bottom 0.305: B.J4.2 14.77,16.83 13.47,15.53 13.47,14.71 12.24,13.47 11.66,13.47 10.94,12.75 | B.J2.2 7.86,12.23 9.1,13.47 10.21,13.47 10.94,12.75 | 10.94,12.75 10.94,11.75 12.23,10.45 B.J3.3
SDA3
  Top 0.305: B.U2.11 37.62,18.45 B.J7.2 | B.J5.2 28.4,11.93 29.7,10.62 29.7,10.41 30.05,10.06 30.29,10.06 32.54,7.81 B.R13.1
  Bottom 0.305: B.J7.2 38.77,16.83 37.48,15.53 37.48,14.71 36.24,13.47 35.66,13.47 34.94,12.75 | B.J5.2 31.86,12.23 33.1,13.47 34.21,13.47 34.94,12.75 | 34.94,12.75 34.94,11.75 36.23,10.45 B.J6.3
SDA5
  Top 0.305: C.U1.IO21 29.1,35.58 C.J2.2
  Bottom 0.254: C.R2.1 30.6,36.43 30.41,36.23 C.J2.2
TX  (via drill 0.35)
  Top 0.305: C.U1.RXD0 31.66,34.59 33.3,36.23 v33.35,36.32
  Bottom 0.254: U1.21 34.29,37.21 33.4,36.32 v33.35,36.32
TX1
  Bottom 0.305: L.R5.2 30.55,63.52 28.78,65.31 G.J3.4
UPDI
  Top 0.305: B.U1.10 12.14,17.23 11.03,17.23 10.54,16.75 10.54,15.73 7.81,13 7.81,9.48 10.01,7.28 22.47,7.28 B.J1.5
UPDI1
  Top 0.305: B.U2.10 36.14,17.23 35.03,17.23 34.54,16.75 34.54,15.73 31.81,13 31.81,9.48 34.01,7.28 46.47,7.28 B.J8.5
VBATF
  Top 0.813: D.J3.2 22.12,39.25 D.F2.2
VCC  (1 unrouted)
  Bottom 0.305: N.R3.1 62.66,30.99 62.7,30.96 N.R2.1 65.22,30.99 65.27,30.94 N.R1.1 66.06,30.99 66.5,31.44 66.5,34.57 JP4.9
  Bottom 0.813: I.J3.3 70.3,35.93 69.53,35.93 68.92,35.32 N.C1.1 68.29,35.15 67.53,35.15 66.83,34.44
VCC1
  Top 0.406: U$1.1 JP6.2
VCC2  (via drill 0.35)
  Top 0.305: 12.39,34.85 D.U3.5 12.06,34.87 11.48,34.29 D.C1.2 | v19.42,30.76 19.52,30.86 19.52,33.25 19.33,33.45
  Top 0.508: D.U3.5 14.03,34.7 15.24,35.91
  Top 0.61: 12.26,34.72 D.U3.5
  Top 0.813: v14.38,42.34 v14.38,41.27 14.38,39.22 15.24,38.35 15.24,35.91 15.24,35.86 17.66,33.45 19.33,33.45 19.51,33.45 22.29,36.23 D.J3.3
  Bottom 0.305: D.R4.1 21.92,36.23 D.J3.3 | D.T2.G 5.94,33.84 5.94,31.61 7.22,30.33 18.82,30.33 19.25,30.76 v19.42,30.76
  Bottom 0.356: v14.38,41.26 v14.38,41.27
  Bottom 0.61: D.L1.2 15.9,42.91 16.46,42.35 D.U2.BP | 15.43,43.93 D.L1.2 | D.C7.2 13.74,43.98 14.99,43.98 14.89,43.87 | D.L1.2 15.49,43.87 | 14.38,43.57 14.68,43.87
  Bottom 0.813: 14.68,43.87 14.89,43.87 15.49,43.87 | 14.38,41.33 | v14.38,41.27 14.38,41.33 | 14.38,41.33 14.38,43.57
VCC3  (via drill 0.35)
  Top 0.305: B.T1.D 17.07,12.43 | B.J3.1 12.43,12.43 | B.R2.2 7.13,7.45 7.13,6.3 7.88,5.55 8.26,5.55 B.R1.2 | 8.84,5.58 B.R1.2 | 20.32,15.9 B.R7.2 | B.R1.2 8.59,5.22 11.09,5.22 v11.1,5.23
  Top 0.508: B.U1.1 9.34,22.27 v9.78,21.82 | B.T1.D 18.09,12.69 18.81,13.41 18.81,14.94 19.44,15.57 19.99,15.57 B.R7.2
  Top 0.61: 17.07,12.43 12.43,12.43
  Bottom 0.305: v11.1,5.23 13.54,7.67 13.54,10.46 12.23,11.77 B.J3.1
  Bottom 0.356: 16.04,16.65 16.04,18.63
  Bottom 0.508: B.J3.1 B.J4.4 14.77,15.38 16.04,16.65 | v9.78,21.82 9.89,21.93 15.52,21.93 17.02,20.43 17.02,19.61 16.04,18.63
VCC4  (via drill 0.35)
  Top 0.305: B.T2.D 41.07,12.43 | B.J6.1 36.43,12.43 | B.R14.2 31.13,7.45 31.13,6.3 31.88,5.55 32.26,5.55 B.R13.2 | 32.84,5.58 B.R13.2 | 44.32,15.9 B.R11.2 | B.R13.2 32.59,5.22 35.09,5.22 v35.1,5.23
  Top 0.508: B.U2.1 33.34,22.27 v33.78,21.82 | B.T2.D 42.09,12.69 42.81,13.41 42.81,14.94 43.44,15.57 43.99,15.57 B.R11.2
  Top 0.61: 41.07,12.43 36.43,12.43
  Bottom 0.305: v35.1,5.23 37.54,7.67 37.54,10.46 36.23,11.77 B.J6.1
  Bottom 0.356: 40.04,16.65 40.04,18.63
  Bottom 0.508: B.J6.1 B.J7.4 38.77,15.38 40.04,16.65 | v33.78,21.82 33.89,21.93 39.52,21.93 41.02,20.43 41.02,19.61 40.04,18.63
VCC6  (via drill 0.35)
  Top 0.406: 44,31.56 C.U1.3V3 | 45.45,32.13 v45.47,32.13 45.47,31.99 45.96,31.5 C.C1.1
  Top 0.508: C.U1.3V3 44.95,31.58 45.47,32.09 v45.47,32.13
  Bottom 0.254: 30.98,31.38 C.R1.2 | 31.01,34.72 C.R2.2
  Bottom 0.305: 45.54,31.19 45.24,31.49 40.69,31.49 40.39,31.19 32.44,31.19 31.93,31.71 | C.F2.1 44.38,33.71 44.65,33.43 | C.R1.2 31.93,31.71 | 31.93,31.71 31.89,31.74 31.89,34.11 31.56,34.45 31.09,34.45 C.R2.2
  Bottom 0.508: 45.54,31.19 45.54,30.78 C.C3.1 45.51,30.81 45.51,32.09 v45.47,32.13 44.65,32.94 44.65,33.43 | 44.12,34.16 C.F2.1
  Bottom 0.61: 44.12,34.16 43.39,34.16 42.06,35.49 D.L2.2 41.77,35.49 40.33,34.04 39.56,34.04 D.U1.BP
VCC7  (via drill 0.35)
  Top 0.305: 21.5,55.06 L.C1.2
  Top 0.508: U$5.VCC 21.35,56.77 21.85,56.27 L.C1.2 21.67,55.58 20.74,55.58 v20.4,55.24
  Bottom 0.305: L.R3.1 19.55,62.6 21.91,60.23 G.J2.3
  Bottom 0.508: v20.4,55.24 20.4,58.77 21.86,60.23 G.J2.3
VCC8
  Bottom 0.305: L.R6.2 6.31,62.77 G.J1.3
VCC9  (via drill 0.35)
  Top 0.305: 35.9,64.19 v35.92,64.18
  Top 0.508: U$6.VCC 35.9,64.19
  Bottom 0.305: 44.73,59.65 44.53,59.45 L.C2.2 | v35.92,64.18 35.92,64.15 | 41.6,60.96 L.R8.1 41.52,60.97 43.94,60.97 43.97,60.99
  Bottom 0.508: 44.73,59.65 46.02,59.65 G.J4.3 | v35.92,64.18 36.33,63.77 43.36,63.77 44.04,63.09 44.04,60.92 | 44.04,60.92 44.4,60.56 L.C2.2 | 44.04,60.92 43.97,60.99
VCC10
  Top 0.305: 67.91,58.67 U$7.VCC 67.17,58.59 | O.R3.2 65.76,54.06 67,55.3 67,55.29
  Top 0.508: L.C3.2 67,55.29 66.8,55.29 65.66,56.44 65.66,58.47 65.86,58.67 U$7.VCC 68.46,58.67 70.02,60.23 G.J6.3
VCC11
  Bottom 0.305: L.R10.2 54.31,62.77 G.J5.3
VMOT  (via drill 0.35)
  Top 0.813: 20.2,36.9 20.2,37.19 D.F2.1 20.37,37.36 | v19.2,35.99 19.05,36.06 17.96,37.16 D.D2.K | v19.2,35.99 v19.21,35.99 | 20.41,37.39 20.37,37.36 | 20.37,37.36 20.15,37.13 v20.2,35.99 v19.2,35.99
  Bottom 0.305: D.C2.2 20.78,40.89 21.34,40.33 21.34,37.83 21.05,37.54 20.36,37.54 D.F1.1 | 18.32,36.52 D.R7.1
  Bottom 0.813: D.T1.S 14.93,38.99 15.23,38.69 15.23,36.34 15.84,35.73 17.66,35.73 18.32,36.4 D.R7.1 | D.F1.1 20.21,37.23 v20.21,35.99 v19.2,35.99 18.85,35.99 18.32,36.52
VUSB  (via drill 0.35)
  Top 0.305: D.C4.2 20.48,41.01
  Top 0.813: D.J3.1 22.3,41.01 20.48,41.01 18.96,41.01 18.39,40.44 D.D2.A 17.96,40.21 16.49,38.74 16.49,36.32 18.13,34.68 v18.13,34.66 v19.04,34.66 v19.05,34.67
  Bottom 0.305: 12.34,36.26 12.34,36.21 D.R6.2 | D.R6.2 12.52,36.17 | 15.81,34.51 15.96,34.36 15.96,34.73 15.95,34.74 | D.R6.2 12.54,35.94 12.66,35.82 12.67,35.82 12.79,35.82
  Bottom 0.61: 13.03,39.83 D.T1.G 13.03,41.73 12.36,42.4 D.R10.2 | U$3.4 10.14,42.78 10.24,42.68 10.24,42.36 | U$2.A4B9 15.96,34.36 | 12.67,34.94 12.87,34.74 15.95,34.74 18.1,34.74 18.13,34.71 v18.13,34.66 v18.13,34.67 | 12.67,34.84 12.58,34.75 11.31,34.75 11.06,34.5 U$2.B4A9
  Bottom 0.813: D.T1.G 12.93,39.6 12.93,38.87 12.67,38.6 12.67,35.82 12.64,35.8 | D.R10.2 10.24,42.37 10.24,42.36 | 12.32,36.23 12.34,36.26 | v19.05,34.67 v18.13,34.67 | 12.67,34.84 12.67,34.94 12.67,35.81 12.54,35.94
VUSB4  (via drill 0.35)  (4 unrouted)
  Top 0.508: v41.83,40.98 41.83,40.94 v41.83,38.78 41.83,35.2 38.66,32.05 v38.17,32.05
  Top 0.61: v40.43,44.81 40.43,44.79 41.83,43.39 v41.83,40.98
  Bottom 0.254: 36.78,32.23 D.U1.VIN | C.F1.1 44.13,40.98 | 39.26,38.66 39.89,38.66
  Bottom 0.305: 35.03,40.67 35.04,40.68 U$4.A4B9 | D.U1.VIN 35.2,32.16 C.R3.2 | 39.2,38.28 39.2,38.51
  Bottom 0.508: 39.3,38.55 40.16,38.55 40.39,38.78 v41.83,38.78 | v38.17,32.05 38.1,32.12 36.88,32.12 D.U1.VIN
  Bottom 0.61: 41.84,40.99 v41.83,40.98 41.83,40.84 41.3,40.31 40.19,40.31 39.94,40.55 U$4.B4A9 | 35.03,40.84 35.03,40.67 35.03,40.57 34.76,40.29 31.01,40.29 C.C5.2 30.8,40.5 30.8,43.42 32.28,44.9 40.34,44.9 v40.43,44.81
  Bottom 0.813: 41.84,40.98 v41.83,40.98 44.13,40.98

## Text on the board
tPlace: + | − | power / M5 | connector M.5 | conn M.5
bPlace: BT-WT5105 M5 | BT-JDY25 M5 | BT-WT5105 M5 | main M.5 | GND | GND | PA3 | PA3 | GND | VCC | PA6 | VUSB | PA6 | VUSB | PA7 | VBAT | PA7 | VBAT | SCL | SDA | PA7 | PA6 | PA3 | SDA | 3V3 | SDA | 3V3 | SCL | GND | SCL | GND | UPDI | UPDI | adapter 414 / M.5 | adapter 414 / M.5
tNames: Hugo M5